# Altium PCB PCB1.PcbDoc
Units mm, origin at the board's own origin, x right, y up, seen from the top; angles counter-clockwise.
Board outline 55.68 x 85.09 mm, 2 copper layers (Top Layer, Bottom Layer); 21 components, 16 nets, 102 pads, 10 vias.
Unrouted connection lines stored in the file: 10.
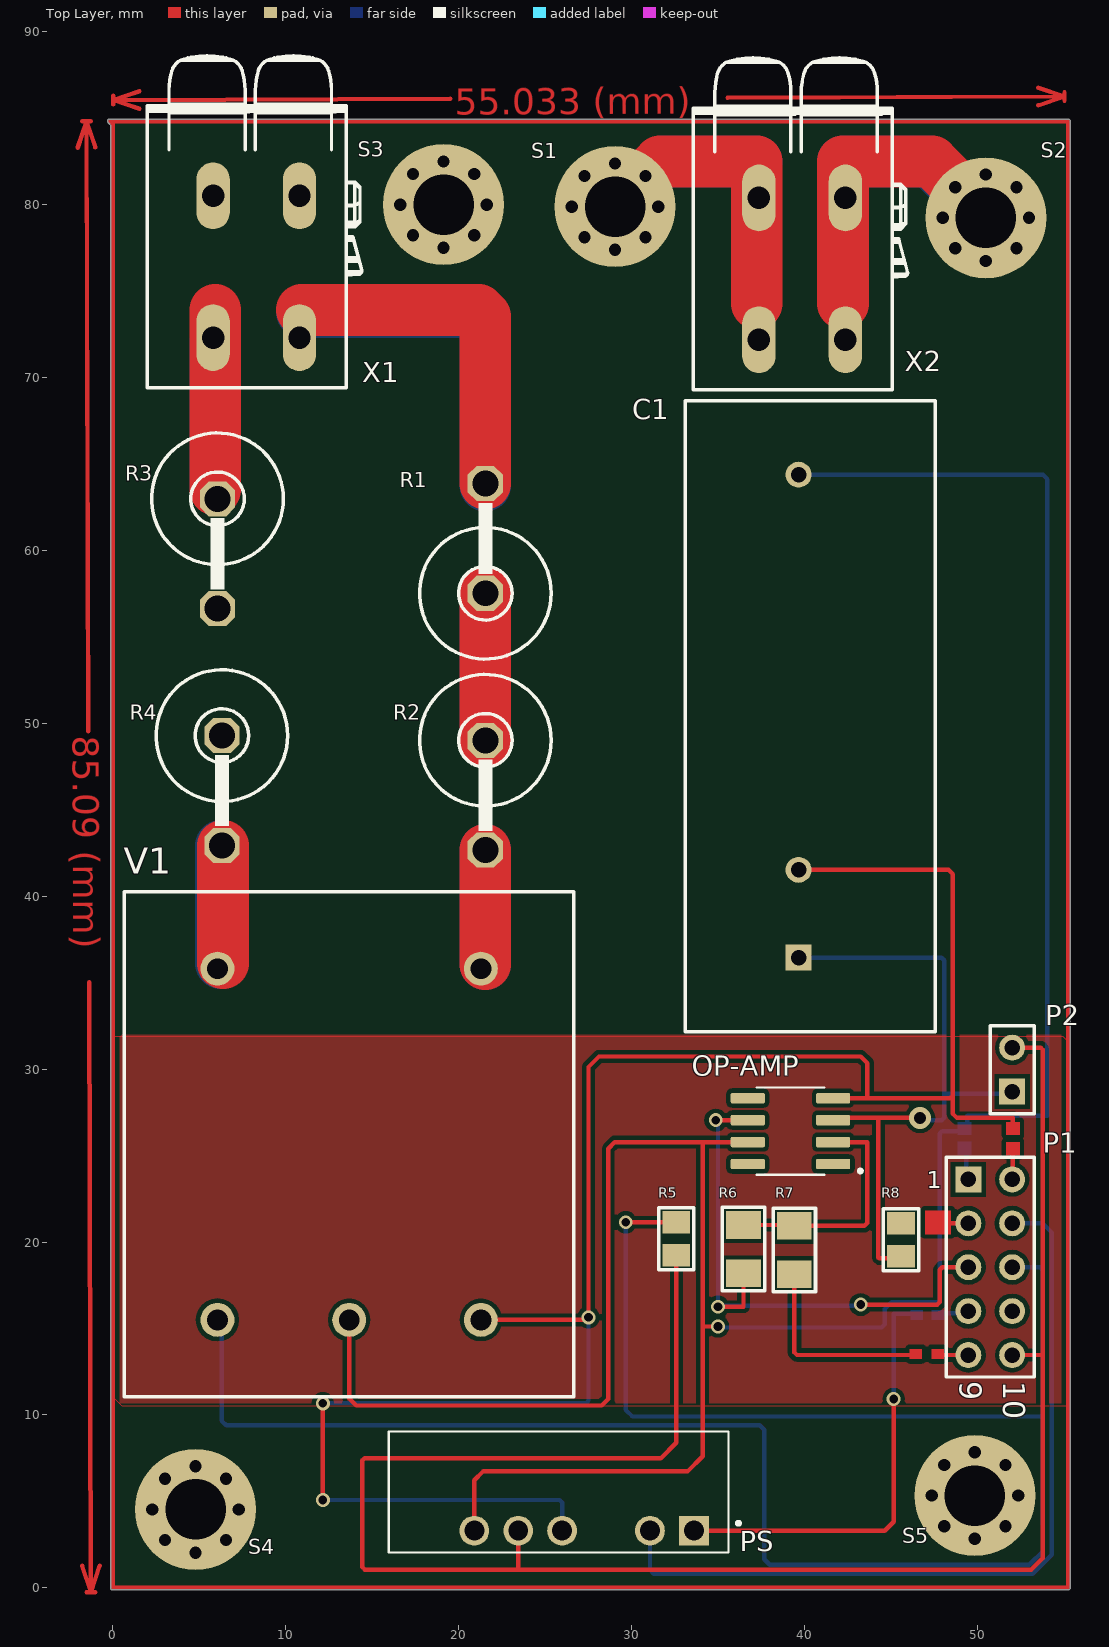
[diagram p0: Top Layer view]
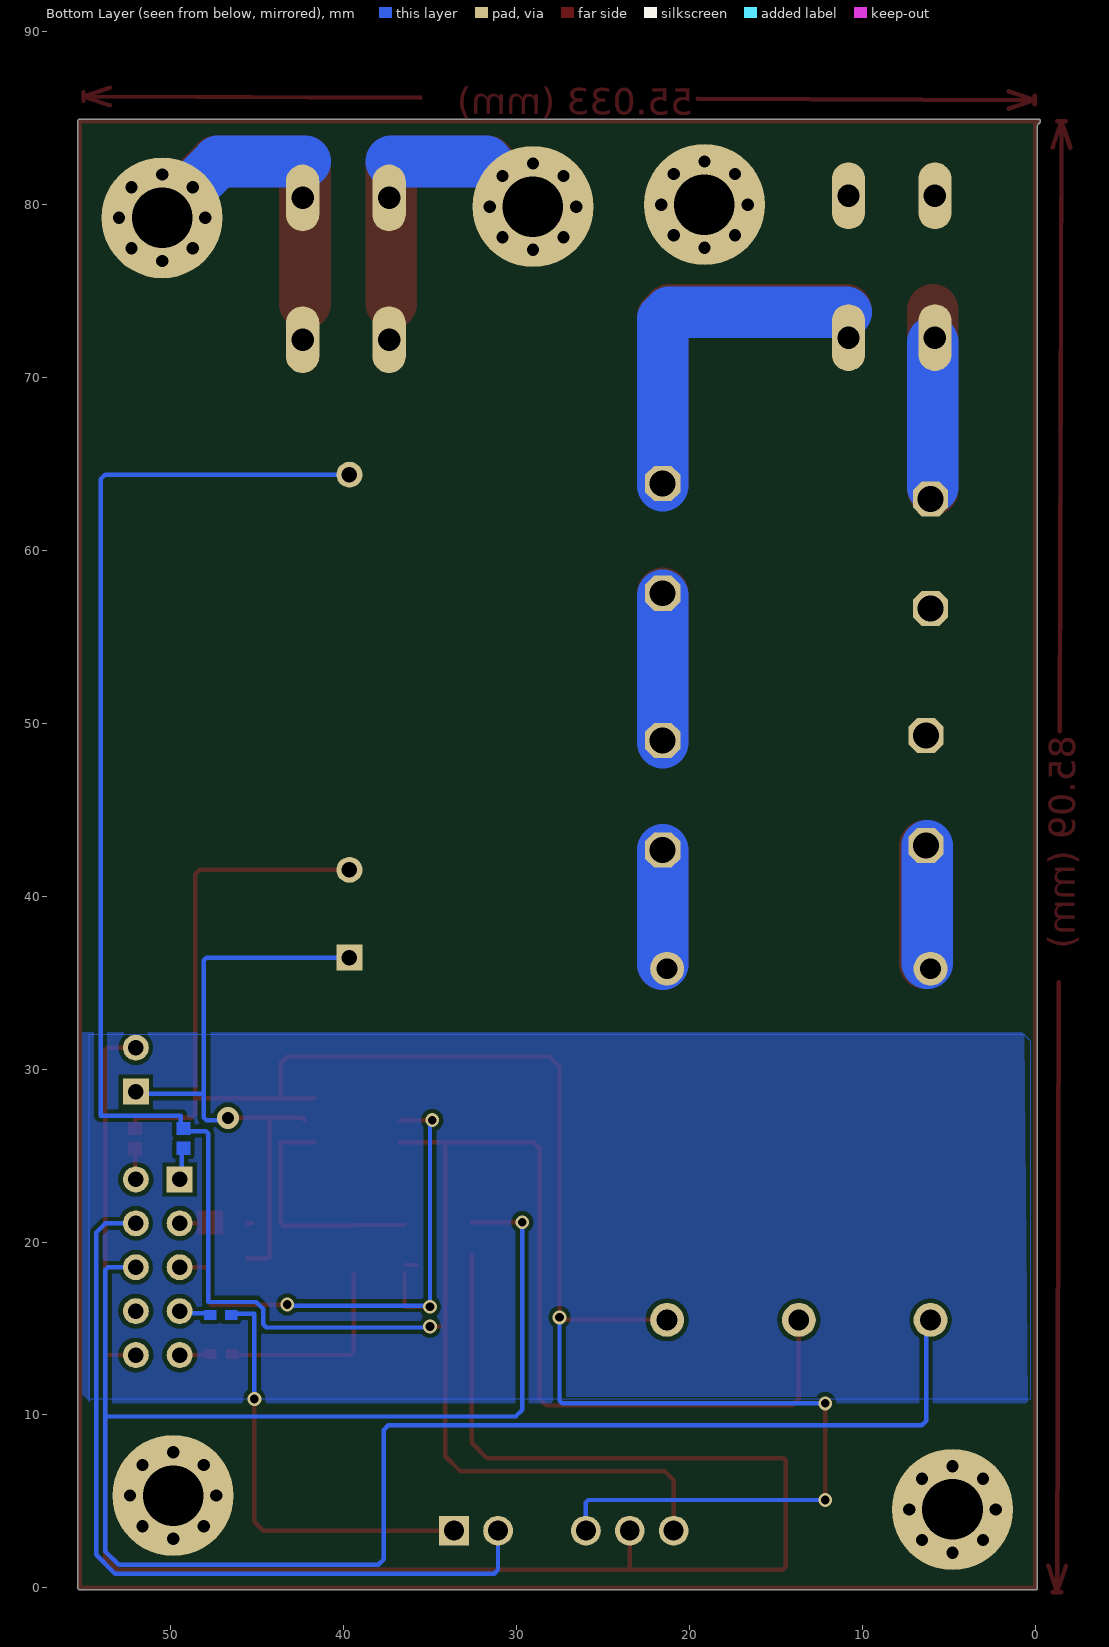
[diagram p1: Bottom Layer view, seen from below]

## Layer stack, top to bottom
Top Solder: solder mask 0.0102, Solder Resist, Dk 3.5
Top Layer: signal copper 0.0356
Dielectric 1: dielectric 0.32, FR-4, Dk 4.8
Bottom Layer: signal copper 0.0356
Bottom Solder: solder mask 0.0102, Solder Resist, Dk 3.5

## Board outline
-0.173,84.66 cw(c-0.083,84.751) -0.173,84.661 cw(c-0.083,84.751) -0.174,84.661 -0.127,84.615 -0.127,0 ccw(c0,0) 0,-0.127 55.254,-0.127 ccw(c55.254,0) 55.382,0 55.382,84.836 ccw(c55.254,84.836) 55.254,84.963 -0.168,84.963 ccw(c-0.168,84.836) -0.258,84.745 -0.259,84.746

## Design rules (kind name [scope] priority, off if disabled: settings)
Clearance [All] p1: gap=0.254 ignorepadtopadclearanceinfootprint=FALSE except(0: Arc-Hole Track-Hole SMDPad-Hole THPad-Hole Via-Hole Fill-Hole Poly-Hole Region-Hole Text-Hole)
PolygonConnect [All] p1: connectstyle=Relief reliefconductorwidth=0.254 reliefentries=4 polygonreliefangle="90 Angle" airgapwidth=0.254
RoutingVias [All] p1: holewidth=0.711 width=1.27 viastyle="Through Hole" minholewidth=0.711 minwidth=1.27 maxholewidth=0.711 maxwidth=1.27
SolderMaskExpansion [All] p1: expansion=0.102
Width [All] p1: maxlimit=0.254 minlimit=0.254 preferedwidth=0.254
30 further rules are at their usual default settings.

## Components (designator, comment, footprint, x,y, rotation, side; value= is the part's Value field where it differs from the comment)
C1 "LA55-P" XDCR_LA55-P 40.345,50.419 r90 top
OP-AMP "OPA376AID" SOIC127P599X175-8N 39.202,26.416 r180 top
P1 "Header 5X2" HDR2X5 49.489,23.622 r270 top
P2 "Header 2" HDR1X2 52.029,28.702 r90 top
PS "RD-0512D" CONV_RD-0512D 25.789,5.532 r180 top
R1 "10K" MY_(3w)_0817V 21.549,62.611 r90 top
R2 "10K" MY_(3w)_0817V 21.549,43.942 r270 top
R3 "10K" MY_(3w)_0817V 6.055,57.912 r270 top
R4 "10K" MY_(3w)_0817V 6.309,44.216 r270 top
R5 "100" MY_0805 32.598,20.193 r270 top
R6 "1.5K" MY_1206 36.509,19.612 r270 top
R7 "1K" MY_1206 39.456,19.558 r270 top
R8 "100" MY_0805 45.593,20.132 r90 top
S1 "Screw" MY_PAD_3MM 29.052,79.893 r0 top net-tie
S2 "Screw" MY_PAD_3MM 50.505,79.248 r0 top net-tie
S3 "Screw" MY_PAD_3MM 19.136,80.01 r0 top net-tie
S4 "Screw" MY_PAD_3MM 4.785,4.532 r0 top net-tie
S5 "Screw" MY_PAD_3MM 49.87,5.334 r0 top net-tie
V1 "LV25-P" XDCR_LV25-P 13.675,25.654 r0 top
X1 "2604-1102" P-2604-1102 3.501,80.518 r90 top
X2 "2604-1102" P-2604-1102 35.077,80.398 r90 top

## Footprints (in the part's own frame and the unit in brackets; to place one, negate y for a bottom-side part, rotate by r counter-clockwise, add the part's x,y. Pads: shape width x height; smd on the part's side, far side on the other; paste and mask are expansions set on the pad)
CONV_RD-0512D [mm]
  rect 1.725x1.725 hole 1.15: 1(-7.825,2.23)
  round 1.725 hole 1.15: 2(-5.285,2.23) 4(-0.205,2.23) 5(2.335,2.23) 6(4.875,2.23)
  silkscreen extent -10.5,-3.5 9.82,3.5
HDR1X2 [mm] "Connector; Header; 2 Position"
  rect 1.5x1.5 hole 0.9: 1(0,0)
  round 1.5 hole 0.9: 2(2.54,0)
  silkscreen extent -1.27,-1.27 3.81,1.27
HDR2X5 [mm] "Connector; Header; 5x2 Position"
  rect 1.5x1.5 hole 0.9: 1(0,0)
  round 1.5 hole 0.9: 2(0,2.54) 3(2.54,0) 4(2.54,2.54) 5(5.08,0) 6(5.08,2.54) 7(7.62,0) 8(7.62,2.54) 9(10.16,0) 10(10.16,2.54)
  silkscreen extent -1.27,-1.27 11.43,3.81
MY_0805 [mm]
  rect 1.3x1.6 smd: 1(-0.95,0) 2(0.95,0)
  silkscreen extent -1.8,-1.02 1.8,1.02, body extent -1,-0.62 1,0.63, height 0.59
MY_1206 [mm]
  rect 1.6x2 smd: 1(-1.375,-0.025) 2(1.425,-0.025)
  silkscreen extent -2.39,-1.24 2.44,1.19, body extent -1.57,-0.83 1.63,0.77, height 0.59
MY_(3w)_0817V [mil]
  oct 80x80 hole 59.06: 1(-200,0) 2(50,0)
  silkscreen extent -350,-150 6,150, body extent -270,-130 61,130, height 936
MY_PAD_3MM [mil]
  round 50 hole 28: 0(-98.43,0) 0(-69.6,-69.6) 0(-69.6,69.6) 0(0,-98.43) 0(0,98.43) 0(69.6,-69.6) 0(69.6,69.6) 0(98.43,0)
  round 275.59 hole 137.8: 0(0,0)
P-2604-1102 [mm]
  oval 3.861x1.93 hole 1.3: P1.1(0,-2.3) P1.2(-8.2,-2.3) P2.1(0,-7.3) P2.2(-8.2,-7.3)
  silkscreen extent -11.1,-10.9 8.1,1.5
SOIC127P599X175-8N [mm]
  rrect25% 1.97x0.6 smd: 1(-2.47,1.905) 2(-2.47,0.635) 3(-2.47,-0.635) 4(-2.47,-1.905) 5(2.47,-1.905) 6(2.47,-0.635) 7(2.47,0.635) 8(2.47,1.905)
  silkscreen extent -4.14,-2.53 1.95,2.53
XDCR_LA55-P [mm]
  rect 1.5x1.5 / inner round 1.5 / far side rect 1.5x1.5 hole 0.9: 1(-13.97,0.675)
  round 1.5 hole 0.9: 2(-8.89,0.675) 3(13.97,0.675)
  silkscreen extent -18.25,-7.22 18.25,7.22, body extent -18.3,-7.18 18.3,7.17, height 27.2
XDCR_LV25-P [mm]
  round 1.962 hole 1.2: 1(-7.62,10.16) 2(7.62,10.16) 3(-7.62,-10.16) 4(0,-10.16) 5(7.62,-10.16)
  silkscreen extent -13,-14.6 13,14.6, body extent -13,-14.6 13,14.6, height 16.4

## Part data
C1: "Current Sensor 50A 1 Channel Hall Effect, Closed Loop Bidirectional Module, Single Pass Through", Package="Module LEM USA", Availability="In Stock", Check_prices=https://www.snapeda.com/parts/LA%2055-P/LEM+USA+Inc./view-part/?ref=eda, MF="LEM USA", MP="LA 55-P", Price=None, Purchase-URL="https://pricing.snapeda.com/search?q=LA 55-P&ref=eda", SnapEDA_Link=https://www.snapeda.com/parts/LA%2055-P/LEM+USA+Inc./view-part/?ref=snap
OP-AMP: "Precision (0.025mV), low noise (7.5nV/rtHz), low quiescent current (760uA) op amp 8-SOIC -40 to 125", Package="SOIC-8 Texas Instruments", Arrow_Electronics-Purchase-URL=https://snapeda.com/shop?store=Arrow+Electronics&id=572715, Availability=Good, BuyPart=https://www.snapeda.com/parts/OPA376AID/Texas%20Instruments/view-part/572715/?ref=eda, DigiKey-Purchase-URL=https://snapeda.com/shop?store=DigiKey&id=572715, MF="Texas Instruments", Mouser-Purchase-URL=https://snapeda.com/shop?store=Mouser&id=572715, MP=OPA376AID, Price=None, SnapEDA_Link=https://www.snapeda.com/parts/OPA376AID/Texas%20Instruments/view-part/572715/?ref=snap, Texas_Instruments-Purchase-URL=https://snapeda.com/shop?store=Texas+Instruments&id=572715
P1: "Header, 5-Pin, Dual row", LatestRevisionDate=17-Jul-2002, LatestRevisionNote="Re-released for DXP Platform.", Publisher="Altium Limited"
P2: "Header, 2-Pin", LatestRevisionDate=17-Jul-2002, LatestRevisionNote="Re-released for DXP Platform.", Publisher="Altium Limited"
PS: "2W DC/DC-Converter 'ECONOLINE' SIP7 1kV unreg", Package="SIP-7 Recom Power", Digi-Key_Part_Number=945-1821-5-ND, Digi-Key_Purchase_URL=https://www.digikey.com/product-detail/en/recom-power/RD-0512D-P/945-1821-5-ND/2303656?utm_source=snapeda&utm_medium=aggregator&utm_campaign=symbol, MF="Recom Power", MP=RD-0512D, SnapEDA_Link=https://www.snapeda.com/parts/RD-0512D/Recom%20Power/view-part/3631333/?ref=snap
R1 R2 R3 R4 R5 R6 R7 R8: library part Res, "Standard resistor", ASiD Part Number=Res-AS
S1 S2 S3 S4 S5: "3mm Screw", ASiD Part Number=Screw-AS
V1: "Voltage, Closed Loop Sensor Voltage Output", Package=None, Check_prices=https://www.snapeda.com/parts/LV%2025-P/LEM%20USA%20Inc./view-part/5138977/?ref=eda, Digi-Key_Part_Number=398-1019-ND, MF="LEM USA Inc.", MP="LV 25-P", SnapEDA_Link=https://www.snapeda.com/parts/LV%2025-P/LEM%20USA%20Inc./view-part/5138977/?ref=snap
X1 X2: "2 Position Wire to Board Terminal Block Horizontal with Board 0.197 (5.00mm) Through Hole", Package=None, Availability="In Stock", Check_prices=https://www.snapeda.com/parts/2604-1102/WAGO/view-part/?ref=eda, MF="WAGO Innovative Connections", MP=2604-1102, Price=None, Purchase-URL=https://pricing.snapeda.com/search/part/2604-1102/?ref=eda, SnapEDA_Link=https://www.snapeda.com/parts/2604-1102/WAGO/view-part/?ref=snap

## Via types
v1: diameter 0.8, hole 0.5, Top Layer to Bottom Layer, 9 vias
v2: diameter 1.27, hole 0.711, Top Layer to Bottom Layer, 1 vias

## Nets (pads, with @x,y where several pads share a name; then routed paths per layer and width w, separated by ;. In a path a pad name is that pad's centre, name@x,y a point inside that pad or via, vN(x,y) a via of type N, cw(c..) or ccw(c..) an arc to the next point about the centre after c; other vN are vias at no path point)
5V: P1.7 P1.8 PS.1 | length 27
  Top Layer w0.254: PS.1 44.652,3.302 45.171,3.82 v1(45.171,10.922)
  Bottom Layer w0.254: v1(45.171,10.922) 45.171,15.853 46.206,15.853 46.228,15.875 46.482,15.875 ; 47.625,15.875 P1.7@49.489,15.875
+12V: C1.3 OP-AMP.7 P1.1 PS.6 V1.4 | length 161.5
  Top Layer w0.254: V1.4 13.675,10.944 14.077,10.541 28.28,10.541 28.661,10.922 28.661,25.4 29.042,25.781 34.122,25.781 ; PS.6 20.914,6.223 21.422,6.731 33.243,6.731 34.122,7.61 34.122,25.781 ; 34.249,15.113 v1(35.011,15.113) ; OP-AMP.7 34.122,25.781
  Bottom Layer w0.254: v1(35.011,15.113) 35.07,15.053 44.476,15.053 44.663,15.24 44.663,16.129 45.065,16.532 47.838,16.532 47.838,26.267 47.986,26.416 49.149,26.416 ; C1.3 53.807,64.389 54.061,64.135 54.061,27.305 49.425,27.305 49.425,26.733 49.362,26.67 ; 49.362,25.146 49.362,23.749 P1.1
-12V: C1.2 OP-AMP.4 P1.2 PS.4 V1.5 | length 116.9
  Top Layer w0.254: v1(12.151,5.08) v1(12.151,10.668) ; V1.5 27.369,15.494 v1(27.518,15.643) 27.518,30.128 28.124,30.734 43.266,30.734 43.647,30.353 43.647,28.321 ; C1.2 48.346,41.529 48.6,41.275 48.6,28.47 ; OP-AMP.4 43.647,28.321 ; P1.2 52.07,23.663 52.07,25.273 ; 52.07,26.543 52.07,27.178 48.832,27.178 48.6,27.41 48.6,28.47 ; 43.647,28.321 48.451,28.321 48.6,28.47
  Bottom Layer w0.254: v1(12.151,5.08) 25.845,5.08 25.994,4.931 PS.4 ; v1(12.151,10.668) 27.369,10.668 27.518,10.817 v1(27.518,15.643) ; C1.2@39.583,41.656 39.837,41.656 39.71,41.529 C1.2
COM: P1.9 P1.10 P2.2 PS.5 R5.2 R7.2 | length 123.7
  Top Layer w0.254: PS.5 23.454,1.052 ; R5.2 32.598,8.382 31.709,7.493 14.564,7.493 14.437,7.366 14.437,1.201 14.585,1.052 23.454,1.052 ; R7.2 39.43,13.611 39.579,13.462 46.355,13.462 ; 47.752,13.462 P1.9 ; P1.10 53.68,13.462 ; P2.2 53.68,31.242 53.785,31.137 53.785,1.701 53.136,1.052 23.454,1.052
GND: P1.3 P1.4 PS.2 R8.2 | length 49.1
  Top Layer w0.254: R8.2@45.298,21.082 R8.2 ; 48.006,21.15 47.938,21.082 P1.3
  Bottom Layer w0.254: PS.2 31.074,1.038 31.293,0.818 53.228,0.818 54.315,1.905 54.315,20.552 53.785,21.082 P1.4
NetOP-AMP_2: OP-AMP.2 R6.1 R7.1 | length 13.9
  Top Layer w0.254: R6.1 R7.1@39.43,20.986 ; R7.1 43.475,20.933 43.647,21.104 43.647,25.781 OP-AMP.2
NetR1_1: R1.1 R2.1 | length 17
  Top Layer w3: R2.1 R1.1
  Bottom Layer w3: R2.1@21.549,48.895 R1.1@21.549,57.404
NetR1_2: R1.2 X1.P2.1 X1.P2.2 | length 40.9
  Top Layer w3: X1.P2.2@10.927,73.914 21.168,73.914 21.549,73.533 R1.2
  Bottom Layer w3: X1.P2.2@10.927,73.787 21.168,73.787 21.549,73.406 R1.2@21.549,63.754
NetR2_2: R2.2 V1.2 | length 13.2
  Top Layer w3: V1.2@21.549,36.068 R2.2
  Bottom Layer w3: V1.2@21.549,36.068 R2.2
NetR3_1: R3.1 X1.P1.1 X1.P1.2 | length 20.1
  Top Layer w0.254: 5.43,64.03 6.055,63.405 R3.1
  Top Layer w3: R3.1@5.928,63.532 5.928,71.937 X1.P1.2@5.928,73.914
  Bottom Layer w3: R3.1@5.928,63.659 X1.P1.2@5.928,72.064
NetR4_2: R4.2 V1.1 | length 13.7
  Top Layer w0.254: V1.1 V1.1@6.115,35.874
  Top Layer w3: V1.1@6.369,36.128 R4.2@6.369,42.926
  Bottom Layer w3: V1.1@6.248,36.128 R4.2@6.248,42.926
NetS1_0: S1.0 X2.P1.1 X2.P1.2 | length 34.6
  Top Layer w0.254: S1.0@26.552,79.893 27.284,80.625 S1.0@27.284,81.661 ; S1.0@30.82,78.125 31.552,78.858 31.552,79.893 30.82,80.625 S1.0@30.82,81.661
  Top Layer w3: S1.0@30.693,81.661 30.82,81.661 31.653,82.495 37.123,82.495 ; 37.25,74.295 37.25,82.495
  Bottom Layer w0.254: S1.0@27.284,78.125 28.016,77.393 29.052,77.393 29.784,78.125 S1.0@30.82,78.125 ; S1.0@29.052,79.893 S1.0@31.552,79.893
  Bottom Layer w3: S1.0@30.82,81.661 30.947,81.661 31.78,82.495 37.25,82.495
NetS2_0: S2.0 X2.P2.1 X2.P2.2 | length 35.7
  Top Layer w0.254: S2.0@48.737,77.48 48.004,78.212 48.004,79.248 48.737,79.98 S2.0@48.737,81.016 ; S2.0@50.505,79.248 S2.0@50.505,81.748 ; S2.0@52.272,77.48 53.005,78.212 S2.0@53.005,79.248
  Top Layer w3: 42.25,74.295 42.25,82.495 ; 42.377,82.495 47.385,82.495 S2.0@48.864,81.016
  Bottom Layer w0.254: S2.0@50.505,76.748 51.237,77.48 S2.0@52.272,77.48 ; S2.0@50.505,79.248 S2.0@53.005,79.248
  Bottom Layer w3: 42.25,82.495 47.258,82.495 S2.0@48.737,81.016
R_SIG_I: C1.1 OP-AMP.3 P2.1 R8.1 | length 37
  Top Layer w0.254: OP-AMP.3@42.25,27.051 42.377,27.178 44.282,27.178 ; R8.1@45.593,19.055 44.355,19.055 44.318,19.091 44.282,19.091 44.282,27.178 ; v2(46.695,27.178) 44.282,27.178
  Bottom Layer w0.254: C1.1 47.943,36.449 48.092,36.3 48.092,28.575 ; v2(46.695,27.178) 46.822,27.051 47.943,27.051 48.092,27.2 48.092,28.575 ; P2.1 51.902,28.575 48.092,28.575
R_SIG_I_OUT: OP-AMP.6 P1.5 R6.2 | length 33.5
  Top Layer w0.254: v1(34.884,27.051) 35.011,27.178 35.011,27.051 OP-AMP.6 ; v1(35.011,16.256) 36.484,16.256 R6.2 ; R6.2@35.773,18.669 R6.2@36.408,18.669 ; v1(43.266,16.383) 47.076,16.383 47.689,16.383 47.838,16.532 47.838,17.145 47.838,18.393 47.986,18.542 49.235,18.542 P1.5
  Bottom Layer w0.254: v1@35.011,27.178 v1(35.011,16.256) 35.074,16.319 43.202,16.319 v1(43.266,16.383)
R_SIG_V_OUT: P1.6 R5.1 V1.3 | length 117.9
  Top Layer w0.254: v1(29.677,21.143) R5.1
  Bottom Layer w0.254: V1.3@6.309,15.748 6.309,9.652 6.563,9.398 37.424,9.398 37.678,9.144 37.678,1.651 38.003,1.326 53.017,1.326 53.807,2.115 53.807,3.67 53.785,3.692 53.785,9.906 ; v1(29.677,21.143) 29.677,10.287 30.058,9.906 53.785,9.906 ; P1.6 53.636,18.542 53.785,18.393 53.785,9.906
pads on no net: OP-AMP.1 OP-AMP.5 OP-AMP.8 R3.2 R4.1 S3.0 S4.0 S5.0
copper on no net: | length 404.9
  Top Layer w0.254: -2.023,83.31 -1.519,84.836 ; -1.778,1.268 -1.265,-0.254 ; -1.773,84.835 -1.265,84.837 ; -1.519,-0.255 -1.011,-0.253 ; -1.414,49.553 -1.519,84.836 ; -1.371,35.029 -1.265,-0.254 ; -1.007,83.314 -1.519,84.836 ; -0.762,1.272 -1.265,-0.254 ; 0.02,86.309 0.021,85.801 ; 1.543,86.569 0.021,86.055 ; 1.546,85.553 0.021,86.055 ; 19.513,86.13 0.021,86.055 ; 35.561,86.192 55.053,86.267 ; 53.527,86.769 55.053,86.267 ; 53.531,85.753 55.053,86.267 ; 55.052,86.521 55.054,86.013 ; -0.168,84.836 55.254,84.836 55.254,0 0,0 0,84.668 -0.083,84.751 -0.168,84.836

## Polygon pours and split planes (outlines as drawn)
no net on Top Layer (solid, pour order 28): 0,31.496 0.508,32.004 55.254,32.004 55.254,10.668 0,10.668
no net on Top Layer (solid, pour order 26): 0.508,31.369
no net on Top Layer "Top Layer-No Net" (solid, shelved, pour order 8): 55.245,31.623 54.991,31.877 0,31.877 0,11.049 0.508,10.541 55.372,10.541 55.372,31.759 55.254,31.877
no net on Bottom Layer (solid, pour order 30): 0.635,32.004 0.762,32.131 55.118,32.131 55.118,11.176 54.61,10.668 0.444,10.668
no net on Bottom Layer (solid, shelved, pour order 24): 6.223,23.876
no net on Bottom Layer (solid, shelved, pour order 22): 0.635,32.004 54.737,32.004 54.737,10.795 54.61,10.922 0.254,10.922 0.254,31.623

## Other copper
Top Layer:
  region net -12V: 52.474,26.185 52.474,26.947 51.666,26.947 51.666,26.185
  region net -12V: 52.474,25.019 52.474,25.781 51.666,25.781 51.666,25.019
  rectangle net GND: 46.99,20.447 48.49,21.828
  rectangle net COM: 47.369,13.23 48.077,13.811
  rectangle net COM: 46.101,13.23 46.809,13.811
  text "55.033 (mm)" at 19.771,85.217 h1.52 r0.22
  text "85.09 (mm)" at -2.327,49.296 h1.52 r270.17
Bottom Layer:
  region net +12V: 49.68,26.185 49.68,26.947 48.872,26.947 48.872,26.185
  region net +12V: 49.68,25.042 49.68,25.804 48.872,25.804 48.872,25.042
  rectangle net 5V: 47.371,15.494 48.079,16.075
  rectangle net 5V: 46.155,15.494 46.863,16.075

## Text inside footprints (layer, text, board x,y; h text height)
P1: Top Overlay "1" at 47.076,23.114 h1; Top Overlay "9" at 48.981,11.938 h1.27 r270; Top Overlay "10" at 51.521,11.938 h1.27 r270
X1: Top Overlay "1" at 5.851,90.418 h1.27 r90
X2: Top Overlay "1" at 37.427,90.298 h1.27 r90